# EAGLE board midi2cv.2.1.main (EAGLE 7.5.0)
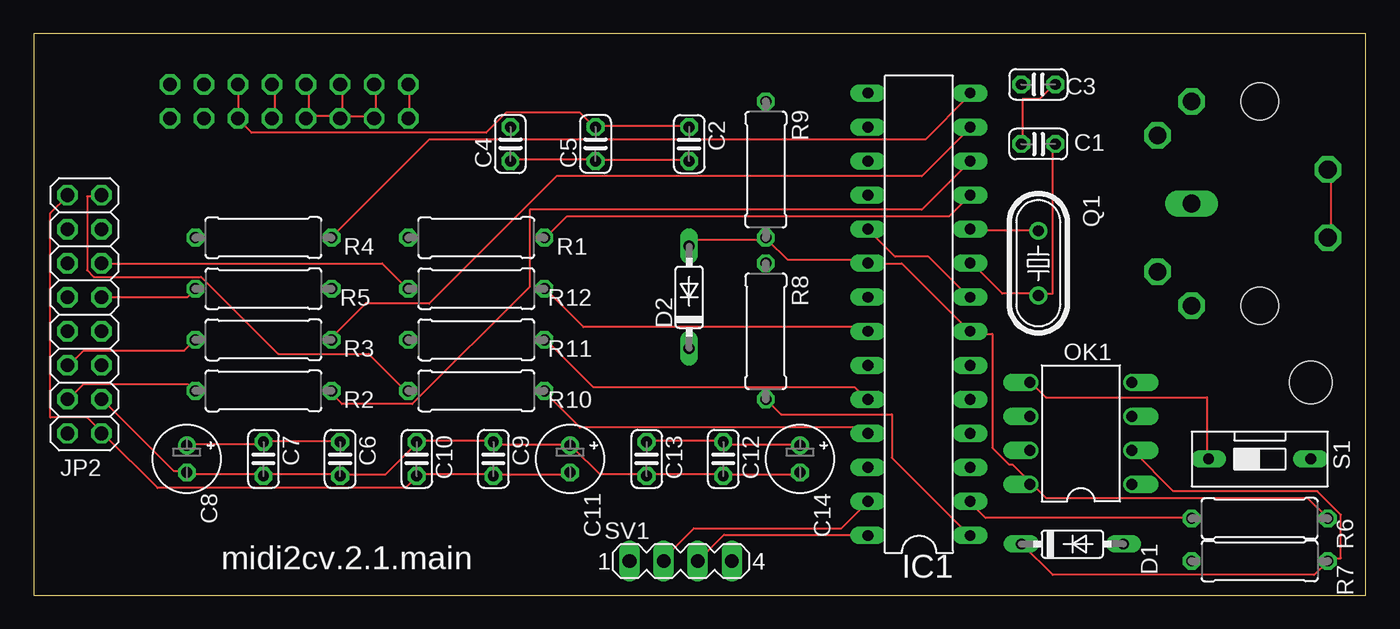
[diagram p0: board, top side]
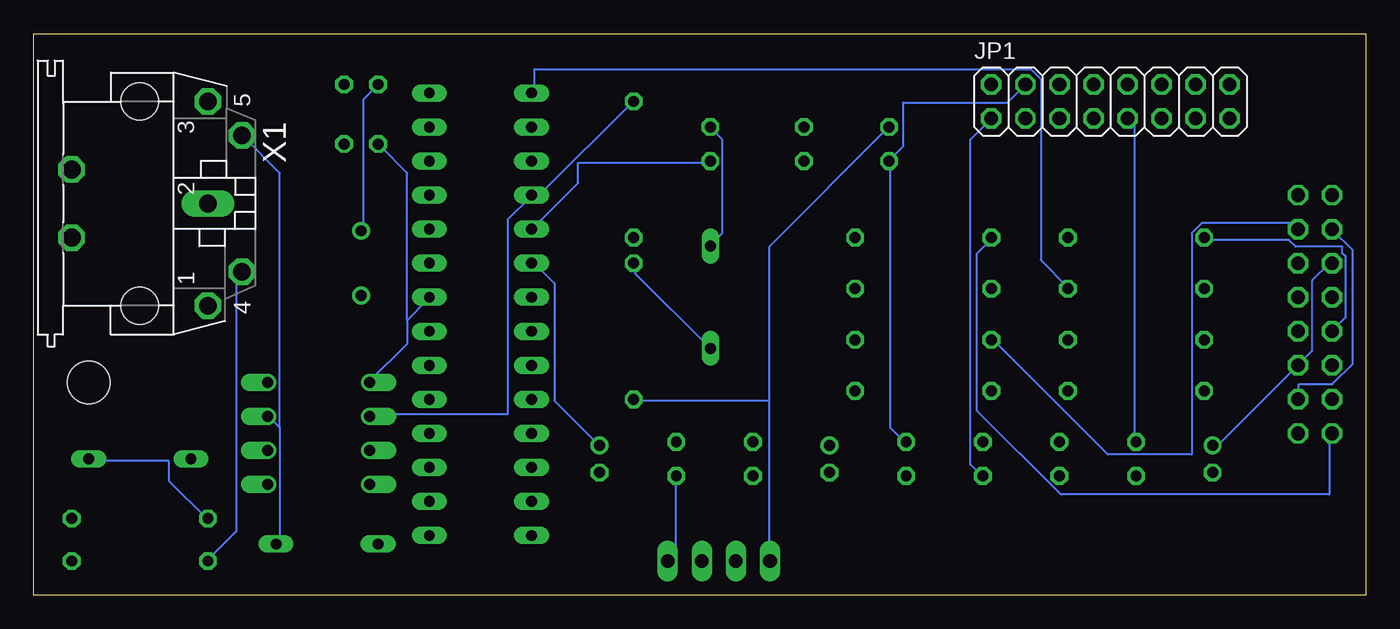
[diagram p1: board, bottom side, seen from below]

Size 99.36 x 41.9 mm. Coordinates in mm from the lower left corner, seen from the top.
Outline: 0,0 99.36,0 99.36,41.9 0,41.9 0,0
Copper layers (1*16): Top 0.035mm / dielectric 1.5mm / Bottom 0.035mm
Design rules "SeeedStudio_2layer_DRU_no_angle_20140221 *": minimum track width 6mil, minimum drill 12mil, track to track 6mil, track to pad 6mil, pad to pad 6mil, via to via 6mil, smd to smd 0mil, copper to edge 10mil, drill to drill 10mil, minimum pad ring 10mil, minimum via ring 6mil, stop-mask expansion 2mil, vias tented up to drill 100mil, thermal gap 10mil
Holes 3.2 mm at 95.25,15.88

## Footprints (pad centres in the part's own frame; a part is rotated, then mirrored left to right if it is on the bottom)
C025-024X044 = drill 0.813 octagon: 1 -1.27,0; 2 1.27,0
E2-5 = drill 0.813 pad 1.27: + -1.016,0 | drill 0.813 pad 1.27 octagon: - 1.016,0
DO35-7 = drill 0.813 long: A 3.81,0; C -3.81,0
DIL28-3 = drill 0.813 long: 1 -16.51,-3.81; 2 -13.97,-3.81; 3 -11.43,-3.81; 4 -8.89,-3.81; 5 -6.35,-3.81; 6 -3.81,-3.81; 7 -1.27,-3.81; 8 1.27,-3.81; 9 3.81,-3.81; 10 6.35,-3.81; 11 8.89,-3.81; 12 11.43,-3.81; 13 13.97,-3.81; 14 16.51,-3.81; 15 16.51,3.81; 16 13.97,3.81; 17 11.43,3.81; 18 8.89,3.81; 19 6.35,3.81; 20 3.81,3.81; 21 1.27,3.81; 22 -1.27,3.81; 23 -3.81,3.81; 24 -6.35,3.81; 25 -8.89,3.81; 26 -11.43,3.81; 27 -13.97,3.81; 28 -16.51,3.81
2X08 = drill 1.016 octagon: 1 -8.89,-1.27; 2 -8.89,1.27; 3 -6.35,-1.27; 4 -6.35,1.27; 5 -3.81,-1.27; 6 -3.81,1.27; 7 -1.27,-1.27; 8 -1.27,1.27; 9 1.27,-1.27; 10 1.27,1.27; 11 3.81,-1.27; 12 3.81,1.27; 13 6.35,-1.27; 14 6.35,1.27; 15 8.89,-1.27; 16 8.89,1.27
DIL08 = drill 0.813 offset: 1 -3.81,-3.81; 2 -1.27,-3.81; 3 1.27,-3.81; 4 3.81,-3.81; 5 3.81,3.81; 6 1.27,3.81; 7 -1.27,3.81; 8 -3.81,3.81
HC49/S = drill 0.813: 1 -2.413,0; 2 2.413,0
0309/10 = drill 0.813 octagon: 1 -5.08,0; 2 5.08,0
DS-01 = drill 0.813 long: 1 0,-3.81; 2 0,3.81
MA04-1 = drill 1.016 long: 1 -3.81,0; 2 -1.27,0; 3 1.27,0; 4 3.81,0
MAB5SH = drill 1.321 octagon: 1 7.62,5.08; 3 -7.62,5.08; 4 5.08,7.62; 5 -5.08,7.62; PE -2.54,-5.08; PE@ 2.54,-5.08 | drill 1.321 long: 2 0,5.08 | hole 2.794: 7.62,0; -7.62,0

## Placement (x,y rotation side)
C1  15pF  [C025-024X044]  74.93,33.66 0 top
C2  0.1uF  [C025-024X044]  48.9,33.66 270 top
C3  15pF  [C025-024X044]  74.93,38.1 180 top
C4  0.1uF  [C025-024X044]  35.56,33.66 90 top
C5  0.1uF  [C025-024X044]  41.91,33.66 90 top
C6  0.01uF  [C025-024X044]  22.86,10.16 270 top
C7  0.1uF  [C025-024X044]  17.14,10.16 270 top
C8  10uF  [E2-5]  11.43,10.16 270 top
C9  0.01uF  [C025-024X044]  34.29,10.16 270 top
C10  0.1uF  [C025-024X044]  28.57,10.16 270 top
C11  10uF  [E2-5]  40.01,10.16 270 top
C12  0.01uF  [C025-024X044]  51.44,10.16 270 top
C13  0.1uF  [C025-024X044]  45.72,10.16 270 top
C14  2.2uF  [E2-5]  57.15,10.16 270 top
D1  1N4148  [DO35-7]  77.47,3.81 0 top
D2  1N4148  [DO35-7]  48.9,22.23 90 top
IC1  PIC18F2431DIP  [DIL28-3]  66.04,20.95 90 top
JP1  PWR  [2X08]  19.05,36.83 0 bottom
JP2  TO PNL  [2X08]  3.81,20.95 90 top
OK1  6N137  [DIL08]  78.11,12.06 90 top
Q1  20MHz  [HC49/S]  74.93,24.77 270 top
R1  390  [0309/10]  33.02,26.67 0 top
R2  390  [0309/10]  17.14,15.24 0 top
R3  390  [0309/10]  17.14,19.05 0 top
R4  390  [0309/10]  17.14,26.67 0 top
R5  390  [0309/10]  17.14,22.86 180 top
R6  10K  [0309/10]  91.44,5.71 0 top
R7  220  [0309/10]  91.44,2.54 180 top
R8  10K  [0309/10]  54.61,19.68 270 top
R9  360  [0309/10]  54.61,31.75 90 top
R10  390  [0309/10]  33.02,15.24 180 top
R11  390  [0309/10]  33.02,19.05 180 top
R12  390  [0309/10]  33.02,22.86 180 top
S1  MIDI Mode  [DS-01]  91.44,10.16 270 top
SV1  PROGRAM  [MA04-1]  48.26,2.54 0 top
X1  MAB5SH  [MAB5SH]  91.44,29.21 270 bottom

## Library data of the parts
C1-C14 D1 D2 R1-R12 = _common
IC1 = _common; MF: MICROCHIP; MPN: PIC18F2431-I/SP
JP1 JP2 = pinhead
OK1 = optocoupler; MPN: 6N137; OC_FARNELL: 1328376; OC_NEWARK: 52M1895
Q1 = crystal; OC_FARNELL: 1667008; OC_NEWARK: unknown
S1 = switch-dil; OC_FARNELL: unknown; OC_NEWARK: unknown
SV1 = con-lstb; OC_FARNELL: unknown; OC_NEWARK: unknown
X1 = con-hirschmann; OC_FARNELL: 809883; OC_NEWARK: unknown

## Nets
0V: C1.1 C2.2 C3.1 C4.1 C5.1 C6.2 C7.2 C8.- C9.1 C10.1 C11.+ C12.2 C13.2 C14.- IC1.8 IC1.19 JP1.3 JP1.4 JP1.5 JP1.6 JP1.7 JP1.8 JP2.3 JP2.14 OK1.5 S1.1 SV1.4
+5V: C2.1 C5.2 C12.1 C13.1 C14.+ D2.A IC1.7 IC1.20 JP1.11 JP1.12 OK1.8 R6.2 R9.1
+12V: C6.1 C7.1 C8.+ JP1.9 JP1.10 JP2.5 JP2.12
-12V: C9.2 C10.2 C11.- JP1.1 JP1.2 JP2.1 JP2.16
CV1: JP2.11 R12.2
CV2: JP2.13 R11.2
CV3: JP2.15 R10.2
GATE1: JP2.2 R1.1
GATE2: JP2.4 R2.1
GATE3: JP2.6 R3.1
GATE4: JP2.8 R4.1
GATE5: JP2.9 R5.2
N$1: D2.C R8.1
N$6: C3.2 IC1.10 Q1.1
N$9: R7.2 X1.4
N$10: D1.A OK1.3 X1.5
N$11: D1.C OK1.2 R7.1
N$13: IC1.18 OK1.6 R9.2
N$16: IC1.25 R10.1
N$17: IC1.24 R11.1
N$18: IC1.22 R12.1
N$19: IC1.15 R5.1
N$20: IC1.2 R6.1 S1.2
N$26: IC1.11 R1.2
N$27: C1.2 IC1.9 Q1.2
N$28: IC1.12 R2.2
N$29: IC1.13 R3.2
N$30: IC1.14 R4.2
PE: X1.PE X1.PE@
PGC: IC1.27 SV1.2
PGD: IC1.28 SV1.3
VPP: C4.2 IC1.1 R8.2 SV1.1

## Tracks (layer width: path | path; a pad name or v marks a point on that pad's centre or on a via)
0V
  Top 0.152: C14.- 57,9 51.5,9 C12.2 51.25,9 45.75,9 C13.2 45.5,9 42.25,9 40.25,11 C11.+ 40,11.25 34.5,11.25 C9.1 34.25,11.5 28.75,11.5 C10.1 28.5,11.25 26.25,9 23,9 C6.2 22.75,9 17.25,9 C7.2 17,9 11.5,9 C8.- 11.25,9.25 10.5,9.25 5.25,14.5 JP2.3 | JP1.4 25.5,38 25.5,35.75 JP1.3 25.25,35.75 23,35.75 | 20.5,35.75 20.5,38 JP1.8 | 23,35.75 23,38 JP1.6 | 20.5,35.75 22.75,35.75 JP1.5 23,35.75 | 20.5,35.75 JP1.7 | C4.1 35.75,32.5 41.75,32.5 C5.1 42,32.5 48.75,32.5 C2.2 | C1.1 73.75,33.75 73.75,37 75,37 76,38 C3.1 | IC1.19 62.25,27.25 64.25,25.25 66.75,25.25 69.75,22.25 IC1.8 | S1.1 87.5,10.25 87.5,14.75 75.5,14.75 74.5,15.75 OK1.5
  Bottom 0.152: SV1.4 52,2.75 51.5,3.25 51.5,8.75 C12.2 | JP2.14 2.5,27.25 1,25.75 1,17.25 2.5,15.75 5,15.75 5,14.75 JP2.3 | JP1.4 26.75,36.75 34.5,36.75 34.5,33.5 35.5,32.5 C4.1 35.5,32.25 35.5,12.5 34.5,11.5 C9.1 | 71.5,20.5 71.5,18.75 74.25,16 OK1.5 | 71.5,20.5 70,22 IC1.8 | 71.5,20.5 71.5,31.5 73.5,33.5 C1.1 | C2.2 49,32.25 58.75,32.25 58.75,30.75 62,27.5 IC1.19
+5V
  Top 0.152: JP1.12 15.25,38 15.25,35.75 JP1.11 15.25,35.5 16.25,34.5 33.75,34.5 35.25,36 40.75,36 41.75,35 C5.2 42,35 48.75,35 C2.1 | C13.1 45.75,11.5 51.25,11.5 C12.1 51.5,11.25 57,11.25 C14.+ | D2.A 49,26.25 49.25,26.5 54.5,26.5 R9.1 54.75,26.5 56.25,25 62,25 IC1.20 62.25,24.75 64.75,24.75 69.75,19.75 IC1.7 70,19.5 71.5,19.5 71.5,11 72.75,9.75 73,9.75 74.25,8.5 OK1.8 74.5,8.25 75.5,7.25 95,7.25 96.5,5.75 R6.2
  Bottom 0.152: C14.+ 57.25,11.25 60.5,14.5 60.5,23.25 62,24.75 IC1.20 | C2.1 48.75,34.75 48,34 48,27 48.75,26.25 D2.A
+12V
  Top 0.152: JP1.9 18,35.75 18,38 JP1.10 | C8.+ 11.5,11.25 17,11.25 C7.1 17.25,11.5 22.75,11.5 C6.1
  Bottom 0.152: JP2.12 2.75,24.75 4,23.5 4,18.25 5,17.25 JP2.5 5.25,17 11.25,11 C8.+ | JP1.9 17.75,35.5 17.25,35 17.25,11.5 C7.1
-12V
  Top 0.152: JP2.16 2.5,29.75 1.25,28.5 1.25,13.25 4,13.25 5,12.25 JP2.1 5.25,12 9.25,8 27.75,8 28.5,8.75 C10.2 28.75,9 34.25,9 C9.2 34.5,9 40,9 C11.- | JP1.1 28,35.75 28,38 JP1.2
  Bottom 0.152: JP1.1 29.5,34 29.5,9.75 28.75,9 C10.2
CV1
  Top 0.152: R12.2 27.75,23 26,24.75 5.25,24.75 JP2.11
CV2
  Bottom 0.152: R11.2 27.75,19 19.25,10.5 13,10.5 13,27 12.25,27.75 5.25,27.75 5.25,27.5 JP2.13
CV3
  Top 0.152: R10.2 27.75,15.25 25,18 18.25,18 12.5,23.75 4.5,23.75 4,24.25 4,29.75 5,29.75 JP2.15
GATE1
  Bottom 0.152: R1.1 28,26.5 29,25.5 29,13.75 22.75,7.5 2.75,7.5 2.75,12 JP2.2
GATE2
  Top 0.152: R2.1 12,15.25 11.5,15.75 3.75,15.75 2.75,14.75 JP2.4
GATE3
  Top 0.152: R3.1 12,19 11.25,18.25 3.75,18.25 2.75,17.25 JP2.6
GATE4
  Bottom 0.152: R4.1 12,26.5 5.75,26.5 5.25,26 1.75,26 1.75,25.5 1.5,25.25 1.5,20.75 2.5,19.75 JP2.8
GATE5
  Top 0.152: R5.2 12,22.75 11.5,22.25 5.25,22.25 JP2.9
N$1
  Bottom 0.152: D2.C 49,18.5 54.5,24 54.5,24.75 R8.1
N$6
  Top 0.152: Q1.1 74.75,27.25 70,27.25 IC1.10
  Bottom 0.152: C3.2 73.75,38 74.75,37 74.75,27.25 Q1.1
N$9
  Bottom 0.152: R7.2 86.25,2.75 84.25,4.75 84.25,23.75 84,24 X1.4
N$10
  Bottom 0.152: 81,12.5 81,4.25 81.25,4 D1.A | 81,12.5 81.75,13.25 OK1.3 | 81,12.5 81,31.5 83.75,34.25 X1.5
N$11
  Top 0.152: D1.C 73.75,3.75 76,1.5 95.5,1.5 96.5,2.5 R7.1 96.75,2.75 97.5,2.75 97.5,6 95.75,7.75 85,7.75 82,10.75 OK1.2
N$13
  Bottom 0.152: OK1.6 74.25,13.5 64,13.5 64,28 62.25,29.75 IC1.18 62,30 61.5,30 54.75,36.75 R9.2
N$16
  Top 0.152: R10.1 38.25,15 40.75,12.5 61.75,12.5 62,12.25 IC1.25
N$17
  Top 0.152: R11.1 38.25,19 41.75,15.5 61.25,15.5 62,14.75 IC1.24
N$18
  Top 0.152: R12.1 38.25,22.75 41,20 61.75,20 62,19.75 IC1.22
N$19
  Bottom 0.152: R5.1 22.25,23 24.25,25 24.25,38.5 25,39.25 62,39.25 62,37.5 IC1.15
N$20
  Top 0.152: IC1.2 70,6.75 71,5.75 86.25,5.75 R6.1
  Bottom 0.152: S1.2 95.25,10 89.25,10 89.25,8.5 86.5,5.75 R6.1
N$26
  Top 0.152: R1.2 38.25,26.75 39.75,28.25 68.25,28.25 69.75,29.75 IC1.11
N$27
  Top 0.152: IC1.9 70,24.75 72.25,22.5 74.75,22.5 Q1.2 75,22.5 76,22.5 76,33.5 C1.2
N$28
  Top 0.152: R2.2 22.25,15 23,14.25 28.25,14.25 37,23 37,28.75 66.25,28.75 69.75,32.25 IC1.12
N$29
  Top 0.152: R3.2 22.25,19.25 24.75,21.75 29.5,21.75 39,31.25 66.25,31.25 69.75,34.75 IC1.13
N$30
  Top 0.152: R4.2 22.25,26.75 29.5,34 66.5,34 69.75,37.25 IC1.14
PE
  Top 0.152: X1.PE@ 96.75,26.75 96.75,31.75 X1.PE
PGC
  Top 0.152: IC1.27 62,6.75 60.25,5 49.25,5 47,2.75 SV1.2
PGD
  Top 0.152: IC1.28 62,4.5 51.5,4.5 49.75,2.75 SV1.3
VPP
  Top 0.152: IC1.1 69.75,4.5 64,10.25 64,13.5 55.75,13.5 54.75,14.5 R8.2
  Bottom 0.152: 44.5,14.5 54.5,14.5 R8.2 | 44.5,14.5 44.5,2.75 SV1.1 | 44.5,14.5 44.5,26 35.75,34.75 C4.2

## Text on the board
tNames: midi2cv.2.1.main